# Altium PCB main.PcbDoc (part 2 of 2)
Units mil, origin at the board's own origin, x right, y up, seen from the top; angles counter-clockwise.
Board outline 5610.24 x 2755.91 mil, 4 copper layers (Top Layer, Int1 (GND), Int2 (PWR), Bottom Layer), stack 53.912 mil thick; 103 components, 58 nets, 279 pads, 77 vias.
Unrouted connection lines stored in the file: 2.
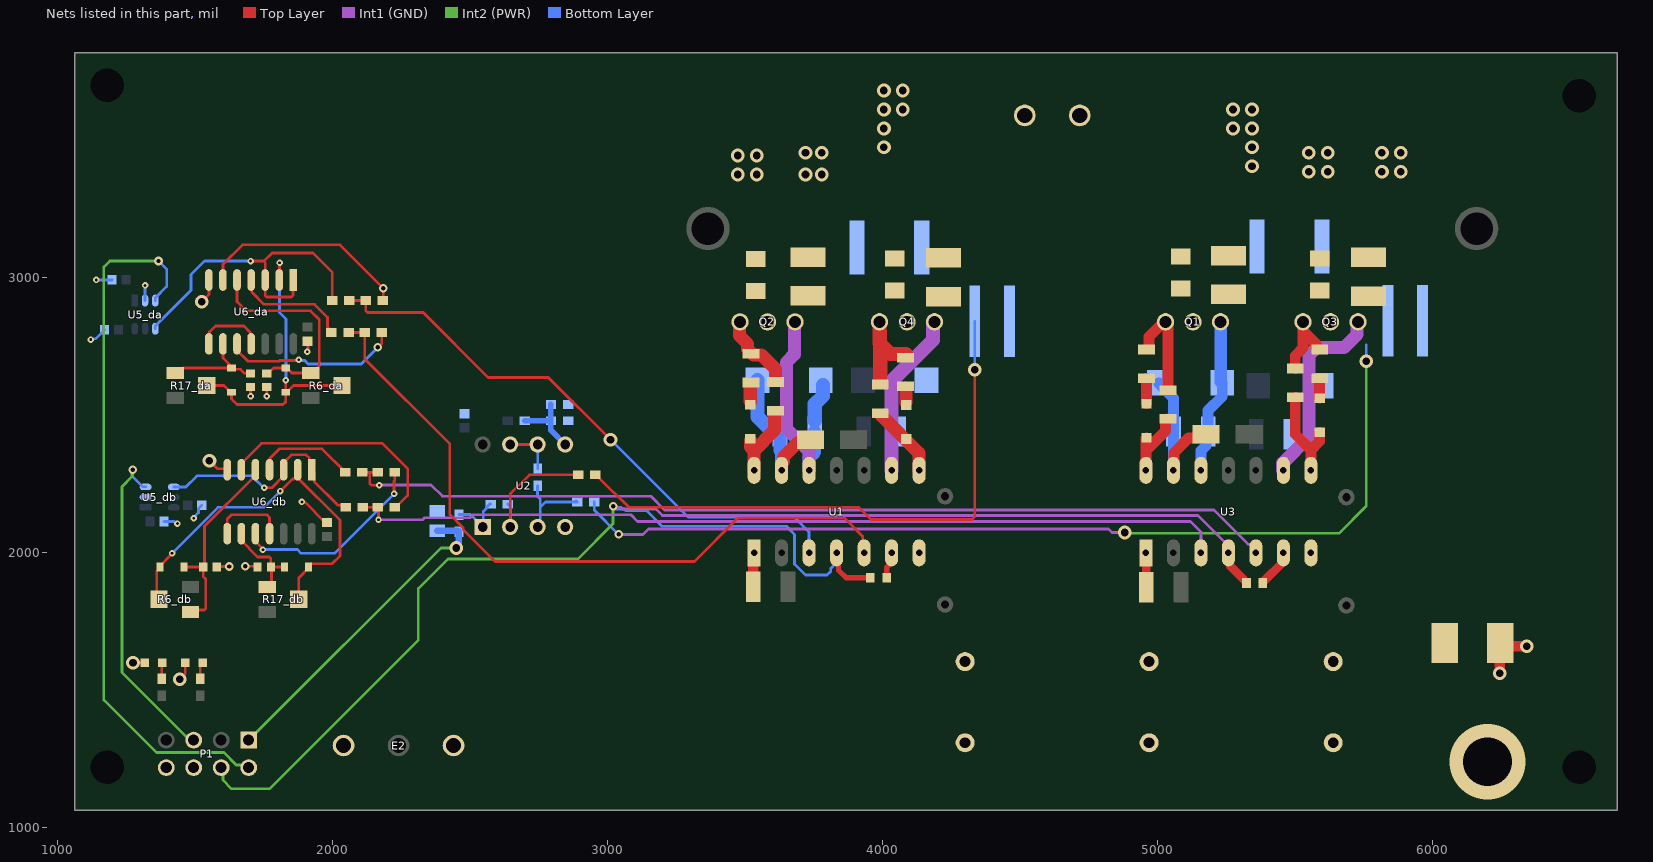
[diagram p4: the nets of this part, all layers, seen from the top]

## Via types
v1: diameter 50, hole 28, Top Layer to Bottom Layer, 45 vias
v2: diameter 23.62, hole 9.84, Top Layer to Bottom Layer, 21 vias
v3: diameter 31.5, hole 15.75, Top Layer to Bottom Layer, 10 vias
v4: diameter 275.59, hole 177.17, Top Layer to Bottom Layer, 1 vias

## Nets (pads, with @x,y where several pads share a name; then routed paths per layer and width w, separated by ;. In a path a pad name is that pad's centre, name@x,y a point inside that pad or via, vN(x,y) a via of type N, cw(c..) or ccw(c..) an arc to the next point about the centre after c; other vN are vias at no path point) (continued)
GND: C3.2 C4.1 C6.2 C7.1 C8_da.1 C8_db.1 C9.2 C10.2 C11.2 C12.2 C13_da.2 C13_db.2 C14.1 C16_da.1 C16_db.1 C18.2 C19.1 C20.2 C22_da.2 C22_db.2 C23_da.2 C23_db.2 C24.2 C25.2 C26.2 C29.1 D5.K D7.K E2.A1 P1.6 P1.8 R7.1 R12.1 R14.1 R21.1 U1.1 U1.6 U1.7 U2.4 U3.1 U3.6 U3.7 U5_da.2 U5_db.2 U6_da.7 U6_db.7 | length 1393.9
  Top Layer w10: v1(1275,1600) D7.K@1318.5,1600 ; v1(1445,1540) 1465.63,1560.63 D5.K@1465.63,1600 ; v1(1525.59,2913.39) 1551.18,2938.98 U6_da.7@1551.18,2992.13 ; v1(1553,2334.69) 1582,2305.69 1614.32,2305.69 U6_db.7@1618.11,2301.91 ; C8_db.1@1579.72,1948.82 1580.91,1950 v3(1625,1950) ; v3(1683,1951) 1725.18,1951 C16_db.1@1727.36,1948.82 ; v2(1702.76,2568.9) C16_da.1@1702.76,2603.35 ; v2(1761.81,2568.9) C8_da.1@1761.81,2603.35 ; v2(1889.76,2185.04) 1892.37,2182.43 1902.51,2182.43 1972.18,2112.77 1975.13,2112.77 1975.21,2112.77 C23_db.2@1984.98,2122.53 ; v2(1908.88,2731.3) 1911.18,2733.6 C23_da.2@1911.18,2776.42 ; U1.1@3531.03,1996.88 U1.1@3533.86,1999.71 ; U3.1@4958.88,1999.71 U3.1@4960.3,1998.29 ; C26.2@5382.87,1889.76 C26.2@5383.86,1889.76 C26.2@5383.86,1892.72 ; U3.6@5458.88,1967.74 U3.6@5458.88,1999.71
  Top Layer w19.68: C25.2@4014.76,1909.45 C25.2@4015.75,1909.45 4015.75,1945.93 4033.86,1964.04 U1.6@4033.86,1999.71
  Top Layer w31.5: C14.1@4960.3,1875.06 U3.1@4960.3,1998.29 ; C26.2@5383.86,1892.72 U3.6@5458.88,1967.74
  Top Layer w39.37: C7.1@3531.03,1877.02 U1.1@3531.03,1996.88
  Bottom Layer w10: v2(1122.05,2775.59) 1124.65,2778.2 1139.42,2778.2 1171.26,2810.04 C22_db.2@1171.26,2811.02 ; v2(1141.73,2992.13) 1197.7,2992.13 C13_da.2@1198.57,2993 ; U5_da.2@1318.9,2917.32 v2(1318.9,2972.44) ; C13_db.2@1387.8,2114.17 1425.45,2114.17 1433.32,2106.3 v2(1437.01,2106.3) ; v2(1496.06,2125.98) 1496.06,2128.31 1513.86,2146.11 1513.86,2161.5 C22_da.2@1525.59,2173.23
  other v4: 6200.79,1240.16
IS+: Q4.S R7.2 R9.2 R24.2 U1.9 | length 2766.9
  Top Layer w10: R9.2@2955.81,2283.46 2959.06,2283.46 3023.17,2219.35 3024.86,2219.35 3078.22,2165.98 3914.21,2165.98 3958.88,2121.31 4326.03,2121.31 4336.63,2131.91 v1(4336.63,2665.35)
  Int1 (GND) w51.18: U1.9@4033.86,2299.71 4033.86,2623.86 4184.09,2774.09 4184.09,2830.9 4190,2836.8 Q4.S@4190,2840
  Bottom Layer w10: R7.2@4336.45,2841.34 4336.63,2841.16 v1(4336.63,2665.35)
IS-: Q3.S R10.2 R21.2 R25.2 U3.9 | length 4250.8
  Top Layer w10: v1(4881.89,2073.88) v1@4881.89,2086.61 ; U3.9@5452.76,2303.15 5456.19,2299.71 U3.9@5458.88,2299.71
  Int1 (GND) w10: v3(3041.34,2066.93) 3129.92,2066.93 3149.61,2086.61 4822.83,2086.61 4835.56,2073.88 v1(4881.89,2073.88)
  Int1 (GND) w47.24: U3.9@5458.88,2299.71 5456.19,2299.71 5456.19,2326.27 5551.18,2421.26 5551.18,2718.39 5578.86,2746.06 5679.13,2746.06 5726.99,2793.92 5726.99,2836.99 Q3.S@5730,2840
  Int2 (PWR) w10: v1(4881.89,2073.88) 4884.91,2070.87 5661.42,2070.87 5759.84,2169.29 v1(5759.84,2696.85)
  Bottom Layer w10: R10.2@2952.76,2185.04 2952.76,2155.51 v3(3041.34,2066.93) ; v1(5759.84,2696.85) 5759.84,2755.91
ISENSE: C29.2 P1.1 R26.1 | length 1187.7
  Int2 (PWR) w10: P1.1@1696.06,1318.9 2394.88,2017.72 v1(2450.79,2017.72)
  Bottom Layer w23.62: C29.2@2381.89,2080.71 2456.69,2080.71 R26.1@2460.63,2076.77 2460.63,2038.38 2450.79,2028.54 v1(2450.79,2017.72)
leg_a: P1.2 U5_da.3 | length 2584.2
  Int2 (PWR) w10: v3(1368.11,3061.02) 1190.94,3061.02 1169.29,3039.37 1169.29,1464.57 1360.47,1273.39 1605.94,1273.39 1650.66,1228.66 1686.3,1228.66 P1.2@1696.06,1218.9
  Bottom Layer w10: U5_da.3@1356.3,2917.32 1356.3,2927.17 1397.64,2968.5 1397.64,3031.5 v3(1368.11,3061.02)
leg_b: P1.5 U5_db.3 | length 1202.7
  Int2 (PWR) w10: v3(1274.09,2301.65) 1271.65,2299.21 1271.65,2276.86 1235,2240.21 1235,1565 1466.4,1333.6 1467.55,1333.6 1482.26,1318.9 P1.5@1496.06,1318.9
  Bottom Layer w10: v3(1274.09,2301.65) 1274.09,2277.01 1311.11,2240 U5_db.3@1320.95,2240
NetC1_1: C1.1 C2.2 D3.2 U1.13 | length 542.9
  Top Layer w47.24: U1.13@3633.86,2299.71 3633.86,2325.3 3640.99,2332.43 3640.99,2348.74 3693.82,2401.57 3728.65,2401.57 D3.2@3738.49,2411.42
  Bottom Layer w10: C2.2@3620,2461 C2.2@3622,2459
  Bottom Layer w47.24: C2.2@3627.97,2440.95 3627.97,2372.56 3633.86,2366.67 U1.13@3633.86,2299.71
  Bottom Layer w51.18: C1.1@3546.28,2627.95 3546.28,2494.72 3580,2461 C2.2@3620,2461
NetC1_2: C1.2 C2.1 C27.1 E1.A2 Q2.S Q4.D R5.2 U1.12 | length 876.8
  Int1 (GND) w47.24: Q2.S@3682.5,2839.91 3680.48,2837.89 3680.48,2721.57 3651.59,2692.68 3651.59,2450.79 3733.86,2368.52 U1.12@3733.86,2299.71
  Bottom Layer w47.24: U1.12@3733.86,2299.71 3733.86,2346.05 3753.95,2366.14 C2.1@3753.95,2440.95
  Bottom Layer w51.18: C2.1@3754.36,2481.59 3754.36,2540.65 3783.89,2570.18 C1.2@3783.89,2609.55
NetC5_2: C5.2 R5.1
  other v1: 3474.41,3375.98 3543.31,3375.98 3720.47,3375.98 3779.53,3375.98 3474.41,3444.88 3543.31,3444.88 3720.47,3454.72 3779.53,3454.72
NetC8_da_2: C8_da.2 D8_da.1 R6_da.3 U6_da.5 | length 816
  Top Layer w10: U6_da.5@1653.54,2992.13 1653.54,2913.39 1686.88,2880.05 1921.31,2880.05 1952.37,2848.98 1952.37,2679 1947.76,2674.38 1947.76,2670.2 1931.1,2653.54 1852.95,2653.54 1834.65,2671.85 D8_da.1@1830.71,2671.85 1786.02,2671.85 1771.65,2657.48 C8_da.2@1771.65,2647.64 ; C8_da.2@1751.97,2647.64 C8_da.2@1771.65,2647.64 ; C8_da.2@1771.65,2642.64 C8_da.2@1771.65,2647.64
NetC8_db_2: C8_db.2 D8_db.1 R6_db.3 U6_db.5 | length 721.1
  Top Layer w10: D8_db.1@1461.22,1948.82 C8_db.2@1530.51,1948.82 ; R6_db.3@1476.09,1788.72 1479.36,1792 1534,1792 1540,1798 1540,1903.73 1530.51,1913.21 C8_db.2@1530.51,1948.82 ; U6_db.5@1720.47,2299.21 1720.47,2281.07 1707.96,2268.56 1707.53,2268.56 1535.43,2096.46 1535.43,1953.74 C8_db.2@1530.51,1948.82
NetC9_1: C9.1 R12.2 R13.1 U2.5 | length 262
  Bottom Layer w20: R13.1@2699.9,2480.32 R12.2@2795.28,2480.32 ; C9.1@2795.28,2539.37 R12.2@2795.28,2480.32 ; U2.5@2846.85,2394.09 2795.28,2445.67 R12.2@2795.28,2480.32
NetC15_1: C15.1 C17.2 D6.2 U3.13 | length 578.6
  Top Layer w10: U3.13@5058.88,2299.71 U3.13@5058.88,2328.57
  Top Layer w39.37: U3.13@5058.88,2299.71 5060.39,2301.22 5060.39,2328.57 5060.39,2363.54 5114.17,2417.32 5163.39,2417.32 D6.2@5177.17,2431.1
  Bottom Layer w39.37: C15.1@5005.91,2618.11 5005.91,2615.16 5059.06,2562.01 C17.2@5059.06,2440.94 5058.88,2440.77 U3.13@5058.88,2299.71
NetC15_2: C15.2 C17.1 C28.1 E1.A1 Q1.S Q3.D R18.2 U3.12 | length 574.9
  Bottom Layer w10: Q1.S@5230,2840 Q1.S@5230.91,2839.09
  Bottom Layer w39.37: U3.12@5158.88,2299.71 5158.88,2371.12 5178.15,2390.38 5178.15,2434.06 C17.1@5185.04,2440.94 5185.04,2517.72 5236.22,2568.9 C15.2@5236.22,2618.11 C15.2@5230.91,2623.42
  Bottom Layer w47.24: C15.2@5230.91,2623.42 Q1.S@5230.91,2839.09
NetC16_da_2: C16_da.2 D9_da.2 R17_da.3 U6_da.9 | length 392.9
  Top Layer w10: R17_da.3@1429.13,2653.54 1438.98,2653.54 1457.28,2671.85 D9_da.2@1633.86,2671.85 ; U6_da.9@1602.36,2759.84 1602.36,2708.66 1633.86,2677.17 D9_da.2@1633.86,2671.85 ; C16_da.2@1702.76,2652.56 1681.1,2652.56 1666.34,2667.32 1633.86,2667.32 D9_da.2@1633.86,2671.85
NetC16_db_2: C16_db.2 D9_db.2 R17_db.3 U6_db.9 | length 324.9
  Top Layer w10: U6_db.9@1669.29,2069.62 1669.29,2044.03 1728.51,1984.82 1770.72,1984.82 1776.57,1978.96 C16_db.2@1776.57,1948.82 ; R17_db.3@1763.78,1875.98 1778.54,1890.75 1778.54,1946.85 C16_db.2@1776.57,1948.82 ; D9_db.2@1826.18,1948.82 1826.18,1944.88 1822.24,1948.82 C16_db.2@1776.57,1948.82
NetC21_2: C21.2 R18.1
  other v1: 5344.49,3405.51 5344.49,3474.41 5275.59,3543.31 5344.49,3543.31 5275.59,3612.2 5344.49,3612.2
NetC27_2: C27.2 R24.1
  other v1: 4005.91,3474.41 4005.91,3543.31 4005.91,3612.2 4074.8,3612.2 4005.91,3681.1 4074.8,3681.1
NetC28_2: C28.2 R25.1
  other v1: 5551.18,3385.83 5620.08,3385.83 5816.93,3385.83 5885.83,3385.83 5551.18,3454.72 5620.08,3454.72 5816.93,3454.72 5885.83,3454.72
NetD1_1: D1.1 R2.1 U1.14 | length 283.3
  Top Layer w47.24: D1.1@3520.3,2407.82 3520.3,2385.23 3533.86,2371.67 ; U1.14@3533.86,2299.71 3533.86,2371.67 ; R2.1@3607.3,2510.83 3607.3,2445.11 3533.86,2371.67
NetD1_2: D1.2 R1.1 | length 63.7
  Top Layer w10: R1.1@3520.3,2611.93 R1.1@3522.63,2614.26
  Top Layer w51.18: D1.2@3520.3,2551.56 R1.1@3520.3,2611.93
NetD2_1: D2.1 R4.1 U1.8 | length 254.7
  Top Layer w47.24: R4.1@3997.91,2498.14 4133.86,2362.19 U1.8@4133.86,2299.71
NetD2_2: D2.2 R15.1 | length 52.7
  Top Layer w47.24: R15.1@4085.26,2598.77 4087.01,2597.03 D2.2@4087.01,2546.77
NetD4_1: D4.1 R16.1 U3.14 | length 267.8
  Top Layer w39.37: U3.14@4958.88,2299.71 4958.88,2372.05 ; D4.1@4960.63,2418.31 4958.88,2416.56 4958.88,2372.05 ; R16.1@5039.37,2487.2 5029.53,2477.36 5029.53,2442.69 4958.88,2372.05
NetD4_2: D4.2 R3.2 | length 92.5
  Top Layer w39.37: D4.2@4960.63,2542.32 R3.2@4960.63,2634.84
NetD5_A: D5.A R31.2 | length 51.5
  Top Layer w10: R31.2@1520,1552.11 1520,1591.38 D5.A@1528.62,1600
NetD7_A: D7.A R32.2 | length 58.5
  Top Layer w10: R32.2@1380,1542.11 1380,1598.5 D7.A@1381.5,1600
NetD8_da_2: D8_da.2 D9_da.1 R6_da.2 R17_da.2 U6_da.2 | length 1129
  Top Layer w10: R17_da.2@1543.31,2608.27 1605.71,2608.27 1629.92,2584.06 D9_da.1@1633.86,2584.06 1633.86,2559.05 1653.54,2539.37 1820.87,2539.37 1830.71,2549.21 D8_da.2@1830.71,2584.06 ; U6_da.2@1807.09,2992.13 1807.61,2992.65 1807.61,3054.79 v2(1808.14,3055.31) ; v2(1830.71,2627.95) D8_da.2@1830.71,2584.06 ; R6_da.2@2035.43,2608.27 1858.86,2608.27 1834.65,2584.06 D8_da.2@1830.71,2584.06
  Bottom Layer w10: v2(1808.14,3055.31) 1808.14,2873.78 1831.34,2850.58 1831.34,2628.58 v2(1830.71,2627.95)
NetD8_db_2: D8_db.2 D9_db.1 R6_db.2 R17_db.2 U6_db.2 | length 1398.8
  Top Layer w10: R6_db.2@1361.91,1834 1361.91,1933.37 1373.43,1944.88 D8_db.2@1373.43,1948.82 1373.43,1952.76 1417.32,1996.65 v2(1417.32,1998.03) ; v2(1811.02,2224.41) 1811.63,2224.41 1855.5,2268.28 1861.23,2268.28 U6_db.2@1869.31,2276.36 ; U6_db.2@1869.31,2297.2 U6_db.2@1874.02,2301.91 ; U6_db.2@1870.66,2295.85 1870.66,2276.36 2027.56,2119.46 2027.56,1988.19 1999.53,1960.16 1921.38,1960.16 1913.98,1952.76 1913.98,1944.88 1877.95,1908.86 R17_db.2@1877.95,1830.71
  Bottom Layer w10: v2(1417.32,1998.03) 1584.65,2165.35 1751.97,2165.35 v2(1811.02,2224.41)
NetD10_1: D10.1 R20.1 U3.8 | length 366.7
  Top Layer w39.37: R20.1@5501.97,2565.94 5501.97,2431.1 5558.88,2374.19 ; U3.8@5558.88,2299.71 5558.88,2374.19 ; D10.1@5590.55,2437.99 5590.55,2405.86 5558.88,2374.19
NetD10_2: D10.2 R19.2 | length 67.9
  Top Layer w39.37: D10.2@5590.55,2562.01 R19.2@5590.55,2629.92
NetQ1_G: Q1.G R3.1 R16.2 | length 366
  Top Layer w39.37: R3.1@4970.47,2753.94 4970.47,2785.43 5025.04,2840 Q1.G@5030,2840 5039.37,2830.63 R16.2@5039.37,2591.54
NetQ2_G: Q2.G R1.2 R2.2 | length 277.7
  Top Layer w47.24: Q2.G@3482.5,2839.91 3480,2837.41 3480,2790 3510,2760 3510,2741.07 3522.63,2728.44 3531.07,2720 3560,2720 3612.22,2667.78 R2.2@3612.22,2634.94
NetQ3_G: Q3.G R19.1 R20.2 | length 275.9
  Top Layer w39.37: R20.2@5501.97,2670.28 5501.97,2716.54 5530,2744.57 5530,2806.61 ; Q3.G@5530,2840 5530,2806.61 ; R19.1@5590.55,2744.09 5578.74,2744.09 5576.77,2746.06 5576.77,2759.84 5530,2806.61
NetQ4_G: Q4.G R4.2 R15.2 | length 407.6
  Top Layer w51.18: R4.2@3992.57,2621.89 3992.57,2717.76 Q4.G@3990,2840 3990,2761.98 4029.2,2722.79 R15.2@4085.26,2722.79
NetR8_1: R8.1 R26.2 U2.1 | length 201.6
  Bottom Layer w10: R26.2@2460.63,2138.88 2502.07,2138.88 U2.1@2546.85,2094.09 2549.21,2096.46 2549.21,2150.58 2561.72,2163.09 2561.72,2166.34 2572.47,2177.09 R8.1@2575.72,2177.09
NetR8_2: R8.2 R9.1 U2.2 | length 490
  Top Layer w10: U2.2@2646.85,2094.09 2646.85,2213.78 2716.54,2283.46 R9.1@2893.7,2283.46 R9.1@2888.16,2289
  Bottom Layer w10: R8.2@2637.83,2177.09 2646.85,2168.06 U2.2@2646.85,2094.09
NetR10_1: R10.1 R11.2 U2.3 | length 306.2
  Bottom Layer w10: U2.3@2746.85,2094.09 2755.91,2103.15 2755.91,2165.35 ; R11.2@2747.34,2243.75 2746.53,2242.95 2746.53,2206.04 2755.91,2196.67 2755.91,2165.35 ; R10.1@2886.64,2189.05 R10.1@2890.65,2185.04 2886.64,2185.04 2775.59,2185.04 2755.91,2165.35
NetR11_1: R11.1 U2.6 U2.7 | length 188.4
  Top Layer w10: U2.7@2646.85,2394.09 U2.6@2746.85,2394.09
  Bottom Layer w10: U2.6@2746.85,2394.09 2746.85,2306.34 R11.1@2747.34,2305.86
NetR27_da_1: R27_da.1 U6_da.10 | length 655
  Top Layer w10: U6_da.10@1653.54,2759.84 1653.54,2735.77 1692.47,2696.85 1805.76,2696.85 1808.16,2699.25 1875.82,2699.25 v2(1878.14,2701.57) ; v3(2165.35,2747.04) 2180.22,2761.91 R27_da.1@2180.22,2811.02
  Bottom Layer w10: v2(1878.14,2701.57) 1880.75,2698.97 1899.77,2698.97 1911.73,2687.01 2105.32,2687.01 v3(2165.35,2747.04)
NetR27_da_2: R27_da.2 R28_da.1 U1.5 | length 2589.2
  Top Layer w10: R28_da.1@2059.06,2801.18 R27_da.2@2118.11,2801.18 ; R27_da.2@2118.11,2811.02 2118.11,2704.72 2427.4,2395.43 2427.4,2139.53 2475.86,2091.07 2475.86,2084.82 2592.17,1968.5 3316.93,1968.5 3474.41,2125.98 3862.2,2125.98 3929.13,2059.06 3929.13,2004.44 U1.5@3933.86,1999.71
NetR27_db_1: R27_db.1 U6_db.10 | length 720.7
  Top Layer w10: U6_db.10@1720.47,2069.62 1720.47,2041.51 1747.83,2014.15 v2(1747.83,2011.63) ; v2(2224.41,2214.57) 2224.41,2260.73 2227.46,2263.78 R27_db.1@2227.46,2292.78
  Bottom Layer w10: v2(1747.83,2011.63) 1872.9,2011.63 1886.49,1998.03 2007.87,1998.03 v2(2224.41,2214.57)
NetR27_db_2: R27_db.2 R28_db.1 U3.5 | length 3432.7
  Top Layer w10: R28_db.1@2109.35,2291.78 2135.83,2291.78 ; R27_db.2@2165.35,2291.78 2135.83,2291.78 ; v2(2170.28,2246.06) 2141.68,2246.06 2135.83,2251.92 2135.83,2291.78
  Int1 (GND) w10: v2(2170.28,2246.06) 2171.21,2247 2359.3,2247 2400.31,2205.98 3158.19,2205.98 3208.35,2155.83 5206.15,2155.83 5330.47,2031.51 5341.68,2031.51 5358.88,2014.31 U3.5@5358.88,1999.71
NetR28_da_2: R28_da.2 U6_da.4 | length 411.6
  Top Layer w10: U6_da.4@1704.72,2992.13 1707.2,2989.65 1707.2,2948.31 1751.97,2903.54 1935.65,2903.54 1982.95,2856.24 1982.95,2821.77 1993.7,2811.02 R28_da.2@1996.95,2811.02
NetR28_db_2: R28_db.2 U6_db.4 | length 369.2
  Top Layer w10: U6_db.4@1771.65,2299.21 1773.15,2300.7 1773.15,2344.01 1807.13,2378 1962.55,2378 2047.24,2293.31 R28_db.2@2047.24,2292.78
NetR29_da_1: R29_da.1 U6_da.6 | length 780
  Top Layer w10: U6_da.6@1602.36,2992.13 1602.36,3049.21 1673.23,3120.08 2027.56,3120.08 v3(2185.04,2962.6) 2185.04,2918.21 R29_da.1@2184.15,2917.32
NetR29_da_2: R29_da.2 R30_da.1 U1.3 | length 2131.6
  Top Layer w10: R30_da.1@2058.86,2917.32 R30_da.1@2062.11,2917.32 R29_da.2@2122.05,2917.32 2122.05,2879.87 2127.91,2874.02 2330.71,2874.02 2566.93,2637.8 2785.43,2637.8 v1(3011.81,2411.42)
  Int2 (PWR) w10: v1@3001.97,2411.42 v1(3011.81,2411.42)
  Bottom Layer w10: v1(3011.81,2411.42) 3293.23,2130 3680,2130 3733.86,2076.14 U1.3@3733.86,1999.71
NetR29_db_1: R29_db.1 U6_db.6 | length 860.6
  Top Layer w10: U6_db.6@1669.29,2299.21 1669.29,2324.8 1742.49,2398 2182,2398 2274,2306 2274,2208.65 2241.46,2176.1 2230.71,2165.35 R29_db.1@2227.46,2165.35
NetR29_db_2: R29_db.2 R30_db.1 U3.3 | length 3202.3
  Top Layer w10: R30_db.1@2110.24,2165.34 2165.34,2165.34 2168,2162.71 v2(2168,2120)
  Int1 (GND) w10: v2(2168,2120) 2327.66,2120 2335.22,2127.56 2500.05,2127.56 2511.11,2138.62 3085.27,2138.62 3110.01,2113.88 5120.86,2113.88 5158.88,2075.86 U3.3@5158.88,1999.71
NetR30_da_2: R30_da.2 U5_da.4 U6_da.1 U6_da.3 | length 1218.8
  Top Layer w10: v2(1702.76,3061.02) 1750,3061.02 ; U6_da.1@1858.27,2992.13 1857.21,2991.07 1857.21,2936.07 1851.36,2930.21 1761.76,2930.21 1755.91,2936.07 U6_da.3@1755.91,2992.13 1755.91,3055.12 1750,3061.02 ; R30_da.2@2000,2917.32 2000,3019.69 1958.66,3061.02 1929.13,3090.55 1781.5,3090.55 1751.97,3061.02 1750,3061.02
  Bottom Layer w10: U5_da.4@1356.3,2814.96 1356.3,2824.8 1486.22,2954.72 1486.22,3011.81 1535.43,3061.02 v2(1702.76,3061.02)
NetR30_db_2: R30_db.2 U5_db.4 U6_db.1 U6_db.3 | length 854.4
  Top Layer w10: v2(1753,2236.69) 1780.52,2236.69 1822.83,2279.01 1822.83,2327.5 1851.61,2356.28 1904.71,2356.28 1916.42,2344.57 1916.42,2310.69 U6_db.1@1933.98,2293.13 ; U6_db.1@1933.98,2290.43 1933.98,2258.94 2020,2172.92 2040.56,2172.92 R30_db.2@2048.13,2165.34
  Bottom Layer w10: U5_db.4@1423.66,2239.65 1467.15,2239.65 1507.49,2280 1707,2280 v2@1753,2234
NetU6_da_8: U6_da.8 U6_da.11 | length 254.4
  Top Layer w10: U6_da.8@1551.18,2759.84 1553.66,2762.32 1553.66,2803.66 1574.8,2824.8 1678.79,2824.8 1701.36,2802.23 1701.36,2763.2 U6_da.11@1704.72,2759.84
NetU6_db_8: U6_db.8 U6_db.11 | length 276.3
  Top Layer w10: U6_db.8@1618.11,2069.62 1618.11,2122.77 1633.86,2138.52 1761.81,2138.52 1771.65,2128.68 U6_db.11@1771.65,2069.62
shutdown: C25.1 C26.1 P1.4 U1.4 U3.4 | length 5756.4
  Top Layer w10: U3.4@5258.88,1999.71 5266.01,1992.59 5266.01,1951.51 ; C26.1@5314.96,1902.56 5314.96,1889.76 C26.1@5325.79,1889.76
  Top Layer w19.68: U1.4@3833.86,1999.71 3840.99,1992.59 3840.99,1936.57 3868.11,1909.45 3952.43,1909.45 3955.05,1906.83 C25.1@3957.68,1909.45
  Top Layer w31.5: 5266.01,1951.51 C26.1@5314.96,1902.56
  Int1 (GND) w10: v3(3021.65,2169.37) 3025.77,2165.26 3051.03,2165.26 3057.4,2158.88 3177.01,2158.88 3200.06,2135.83 5147.64,2135.83 5258.88,2024.58 U3.4@5258.88,1999.71
  Int2 (PWR) w10: P1.4@1596.06,1218.9 1602.2,1212.76 1602.2,1173.39 1633.86,1141.73 1771.65,1141.73 2312.99,1683.07 2312.99,1870.08 2420.63,1977.72 2893.07,1977.72 3021.02,2105.67 3021.02,2168.74 v3(3021.65,2169.37)
  Bottom Layer w10: v3(3021.65,2169.37) 3021.65,2165.98 3028.75,2158.88 3061.65,2158.88 3066.65,2153.88 3141.88,2153.88 3199.31,2096.46 3651.57,2096.46 3681.1,2066.93 3681.1,1958.66 3720.47,1919.29 3799.21,1919.29 3812.59,1932.67 3812.59,1942.78 3833.86,1964.04 U1.4@3833.86,1999.71
VH: C5.1 C10.1 C11.1 C12.1 C20.1 C21.1 C24.1 E2.A3 Q1.D Q2.D R14.2 | length 209.2
  Top Layer w10: R14.2@6247.44,1672.2 R14.2@6259.25,1660.39
  Top Layer w39.37: v1(6245.27,1561.97) R14.2@6245.27,1670.03 ; R14.2@6259.25,1660.39 v1(6343.69,1660.39)
pads on no net: ?.6 H1.1 H1.2 R6_da.1 R6_db.1 R17_da.1 R17_db.1 U1.11 U3.11 U6_da.12 U6_da.13 U6_db.12 U6_db.13

## Polygon pours and split planes (outlines as drawn)
VH on Int2 (PWR) "VH_L03_P007" (solid, pour order 7): 2647.65,1062.99 2359.68,1064.79 2359.68,1601.79 2608.28,1850.39 2864.17,1850.39 ccw(c2864.17,2076.77) 3090.55,2076.77 3090.55,2795.56 3523.55,2795.92 3555.35,2874.02 3562.99,2874.02 3614.63,2874.02 3614.63,2541.78 3587.44,2514.59 ccw(c3955.36,2146.66) 3435.04,2146.66 3435.04,1998.03 ccw(c3582.67,1998.03) 3582.68,1850.39 4281.43,1850.39 ccw(c4281.43,1956.19) 4387.22,1955.02 4391.16,2311.7 4838.78,2797.02 5057.27,2794.5 ccw(c5057.73,2833.76) 5096.96,2832.32 5098.53,2875.31 5090.73,2875.31 5165.45,2875.31 5164.19,2723.45 5162.7,2543.82 4960.65,2416.06 ccw(c5127.08,2152.84) 4815.65,2153.83 4815.27,2035.43 ccw(c4999.72,2034.84) 4999.71,1850.39 6397.64,1850.39 6397.64,1062.99
NetC1_2 on Int2 (PWR) "NETC1_2_L03_P005" (solid, pour order 5): 3651.57,2808.41 3892.29,2808.41 3892.29,2893.7 4041.53,2893.7 4041.53,2808.41 4105.23,2808.41 4153.54,2933.07 4566.93,3415.34 4566.93,3641.73 4242.14,3641.73 3651.57,3051.17
NetC15_2 on Int2 (PWR) "NETC15_2_L03_P018" (solid, pour order 18): 5462.6,2805.12 5187.01,2805.12 5187.01,2903.54 4675.2,3415.35 4675.2,3641.73 5009.84,3641.73 5669.29,2982.28 5669.29,2805.12 5590.55,2805.12 5590.55,2883.86 5462.6,2883.86
GND on Bottom Layer "GND_L04_P016" (solid, pour order 16): 1948.82,1436.34 1948.82,1063.05 1062.99,1062.99 1062.99,3169.29 2952.76,3169.29 2952.76,1998.03 2864.17,1909.45 2301.37,1909.45 1948.82,1572.14
GND on Bottom Layer "GND_L04_P006" (solid, pour order 6): 6397.64,1062.99 1938.98,1062.99 1938.98,1427.06 2392.34,1854.33 4284.31,1854.33 4283.43,2296.43 4283.25,2384.81 4036.27,2385.41 4036.88,2495.6 4117.44,2495.61 4117.44,2674.06 4110.02,2674.14 4227.66,2674.06 ccw(c4303.08,2673.49) 4302.95,2598.07 4442.15,2597.82 4443.23,2697.29 4442.8,2713.94 4444,2927.86 ccw(c4358.85,2928.36) 4358.62,3013.51 4117.44,3012.91 4118.88,3210.51 4820.43,3202.84 4811.97,1854.33 5594.45,1854.33 ccw(c5594.45,2017.66) 5757.78,2017.58 5757.86,2194.67 ccw(c5570.97,2194.75) 5571.43,2381.64 5458.74,2381.92 5454.37,2482.88 5552.46,2658.12 5878.56,2654.5 ccw(c5879.24,2715.19) 5939.93,2715.08 5940.52,3012.91 5568.86,3008.91 5570.34,3210.51 5959.41,3210.51 6397.64,3210.51 6614.17,3210.5 6614.17,1407.83 6604.68,1407.83 ccw(c6604.68,1200.79) 6397.64,1200.79
NetC27_2 on Bottom Layer "NONET_L02_P-001" (solid, pour order 46): 3966.54,3769.68 4340.55,3769.68 4340.55,3336.61 3966.54,3336.61
NetC5_2 on Bottom Layer "NONET_L02_P-001" (solid, pour order 44): 3435.04,3769.68 3818.9,3769.68 3818.9,3346.46 3435.04,3346.46
NetC28_2 on Bottom Layer "NONET_L02_P-001" (solid, pour order 48): 5511.81,3769.68 5915.35,3769.68 5915.35,3346.46 5511.81,3346.46
NetC21_2 on Bottom Layer "NONET_L02_P-001" (solid, pour order 47): 4980.31,3769.68 5383.86,3769.68 5383.86,3346.46 4980.31,3346.46
VH on Bottom Layer "VH_L04_P008" (solid, pour order 8): 3936.47,3211.09 3936.47,3004.99 3755.63,3004.99 ccw(c3816.09,2813.5) 3615.43,2805.68 3549.37,2805.68 3549.37,3211.09
IS- on Bottom Layer "IS-_L04_P025" (solid, pour order 25): 5856.3,2982.28 5856.3,2716.54 5787.4,2716.54 5698.82,2805.12 5698.82,2874.02 5797.24,2972.44 5807.09,2972.44 5856.3,2972.44
VH on Bottom Layer "VH_L04_P019" (solid, pour order 19): 5483.62,3212.64 5483.62,3006.54 5310.01,3006.54 ccw(c5310.01,2858.96) 5162.43,2858.96 5162.43,2807.24 5096.53,2807.24 5096.53,3212.64
no net on Bottom Layer "NONET_L04_P015" (solid, pour order 15): 1949.49,1437.01 1948.82,1436.34 1948.82,1053.21
no net on Bottom Layer "NONET_L04_P014" (solid, pour order 14): 1949.49,1437.01 1949.49,1070.57
IS+ on Bottom Layer "NONET_L02_P-001" (solid, pour order 0): 4356.59,2708.86 4246.59,2708.86 4141.59,2813.86 4141.59,2873.86 4241.59,2973.86 4356.59,2973.86
GND on Top Layer "NONET_L02_P-001" (solid, pour order 13): 6397.64,1473.38 6137.95,1472.56 6135.47,1769.7 6397.64,1771.32 5930.75,1768.44 4812.99,1768.44 4448.83,1768.44 4448.83,1764 2286.16,1794.04 1998.03,1505.91 1940.94,1505.91 1940.94,1200.79 5624.14,1200.79 5625.08,1059.78 5764.12,1060.62 6397.64,1062.99 6397.64,1064.46
NetC5_2 on Top Layer "NONET_L02_P-001" (solid, pour order 39): 3484.25,3043.61 3818.9,3043.61 3818.9,3768.14 3484.25,3768.14 3433.29,3768.14 3429.54,3301.37 3484.25,3301.99
NetC27_2 on Top Layer "NONET_L02_P-001" (solid, pour order 42): 3966.54,3043.27 4343.99,3043.27 4343.99,3767.8 3966.54,3767.8
no net on Top Layer "NONET_L02_P-001" (solid, pour order 45): 3966.54,3767.8 4343.99,3767.8
NetC1_2 on Top Layer "NONET_L02_P-001" (solid, pour order 43): 4126.15,2807.05 4126.15,2944.84 4086.78,2984.21 4008.04,2984.21 4008.04,2915.31 4057.26,2866.1 4057.26,2807.05
IS+ on Top Layer "NONET_L02_P-001" (solid, pour order 41): 4155.68,2974.37 4155.68,2807.05 4293.48,2807.05 4293.48,2974.37
VH on Top Layer "NONET_L02_P-001" (solid, pour order 40): 3618.25,2807.39 3618.25,2945.18 3578.88,2984.55 3500.14,2984.55 3500.14,2915.66 3549.35,2866.44 3549.35,2807.39
NetC1_2 on Top Layer "NONET_L02_P-001" (solid, pour order 38): 3647.78,2974.71 3647.78,2807.39 3785.57,2807.39 3785.57,2974.71
VH on Top Layer "NONET_L02_P-001" (solid, pour order 37): 5166.02,2808.93 5166.02,2946.73 5126.65,2986.1 5047.91,2986.1 5047.91,2917.2 5097.12,2867.99 5097.12,2808.93
NetC21_2 on Top Layer "NONET_L02_P-001" (solid, pour order 36): 4979.01,3045.15 5383.86,3045.15 5383.86,3769.68 4979.01,3769.68
NetC15_2 on Top Layer "NONET_L02_P-001" (solid, pour order 35): 5195.55,2976.25 5195.55,2808.93 5333.34,2808.93 5333.34,2976.25
NetC15_2 on Top Layer "NONET_L02_P-001" (solid, pour order 28): 5669.29,2805.12 5669.29,2942.91 5629.92,2982.28 5551.18,2982.28 5551.18,2913.39 5600.39,2864.17 5600.39,2805.12
NetC28_2 on Top Layer "NONET_L02_P-001" (solid, pour order 27): 5511.81,3041.34 5915.35,3041.34 5915.35,3769.68 5511.81,3769.68
IS- on Top Layer "NONET_L02_P-001" (solid, pour order 26): 5698.82,2972.44 5698.82,2805.12 5836.61,2805.12 5836.61,2972.44
no net on Top Solder "NONET_L02_P-001" (solid): 6048.23,1407.48 6363.19,1407.48 6363.19,1092.52 6048.23,1092.52
GND on Int1 (GND) "GND_L02_P017" (solid, pour order 17): 2135.83,1063.07 1062.99,1062.99 1062.99,3169.29 2951.86,3169.29 2962.91,2077.87 5620.01,2071.75 5623.19,1850.39 2319.22,1850.39 2135.83,1674.93

## Keep-outs
Keep-Out Layer:
  lines w10: 1062.99,1062.99 6377.95,1062.99 6377.95,3818.9 1062.99,3818.9 1062.99,1062.99

## Other copper
Top Layer:
  text "IRS Driver 1.0" at 1163.94,3193.94 h19.68
  text "+3.3 | leg_b | +5 | i_sense" at 1307.99,1137.66 h19.68
  text "GND | GND | shtn | leg_a" at 1334.57,1101.56 h19.68

## Silkscreen, mask and mechanical layers (free items; w line width, h text height)
Top Overlay:
  circle w10: c5177.17,2500 r3.96
  circle w10: c3740.16,2480.32 r3.15
  lines w10: 2090.55,2835 2090.55,2885 ; 2135.83,2251.92 2136.66,2196.24
  text "no_delay" at 1943.94,3000.5 h19.68
  text "delay" at 2118.94,3000.5 h19.68
  text "no_delay" at 1978.94,2335.5 h19.68
  text "delay" at 2168.94,2335.5 h19.68
  text "Heat-Sink GND" at 6057.09,1421.26 h19.68
  text "+" at 4157.48,1211.29 h19.68
  text "+" at 4826.77,1211.29 h19.68
  text "+" at 5525.59,1201.44 h19.68
  text "+" at 4954.72,1073.49 h19.68
Mechanical 1:
  lines w10: 925.2,1102.36 964.57,1062.99 ; 925.2,3779.53 964.57,3818.9 ; 1003.94,1102.36 964.57,1062.99 ; 1003.94,3779.53 964.57,3818.9 ; 1141.73,905.51 1102.36,944.88 ; 1141.73,984.25 1102.36,944.88 ; 6633.86,905.51 6673.23,944.88 ; 6633.86,984.25 6673.23,944.88 ; 964.57,1062.99 964.57,1062.99 ; 964.57,1062.99 964.57,3818.9 ; 964.57,3818.9 964.57,3818.9 ; 1102.36,944.88 6673.23,944.88 ; 6417.32,944.88 6417.32,944.88
  text "70mm" at 921.26,2248.03 h19.68 r90
  text "142.5mm" at 3291.34,811.02 h19.68

## Text inside footprints (layer, text, board x,y; h text height)
E1: Top Overlay "A1" at 4917.5,3611.4 h19.68 r180
E2: Top Overlay "A1" at 1948.82,1525.59 h19.68